# EAGLE board BE_SHIELD (EAGLE 6.4)
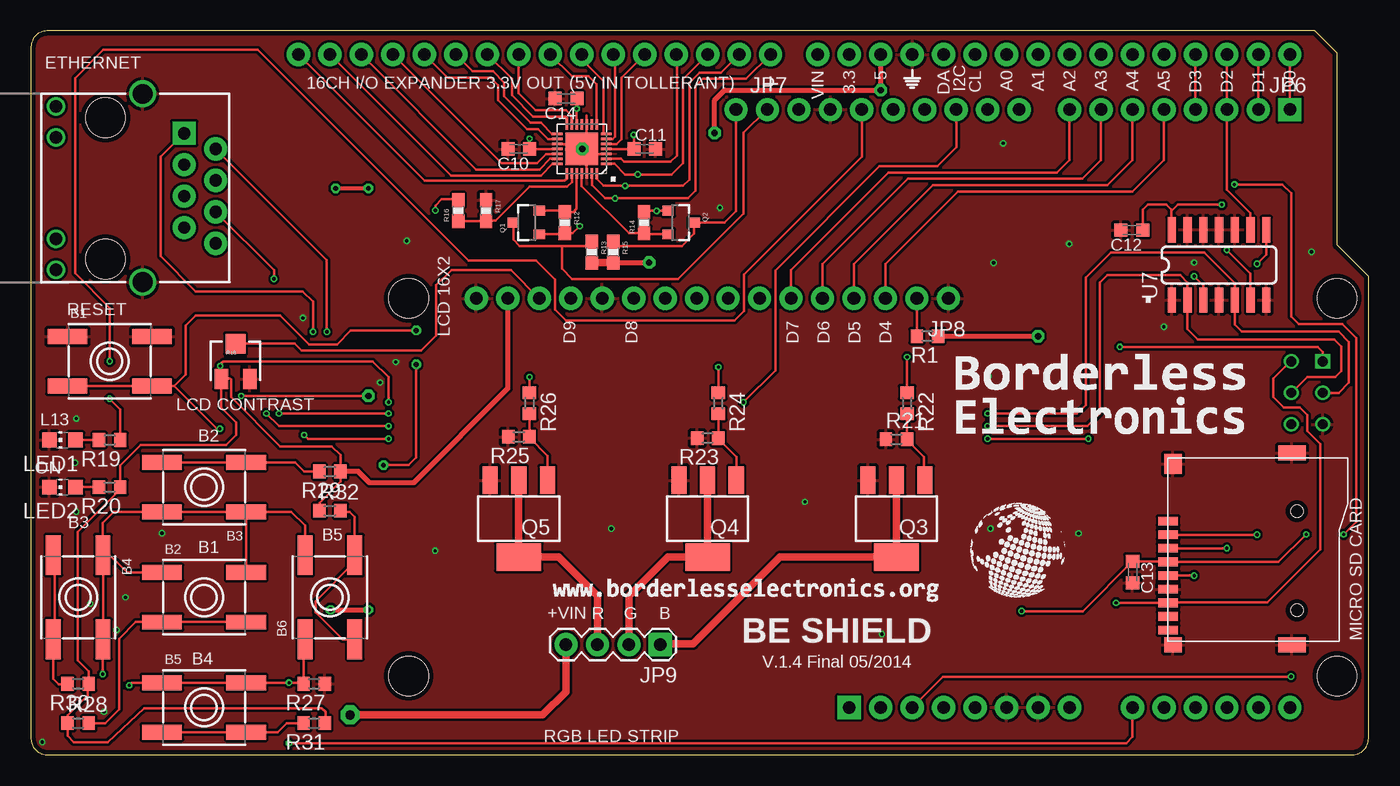
[diagram p0: board, top side]
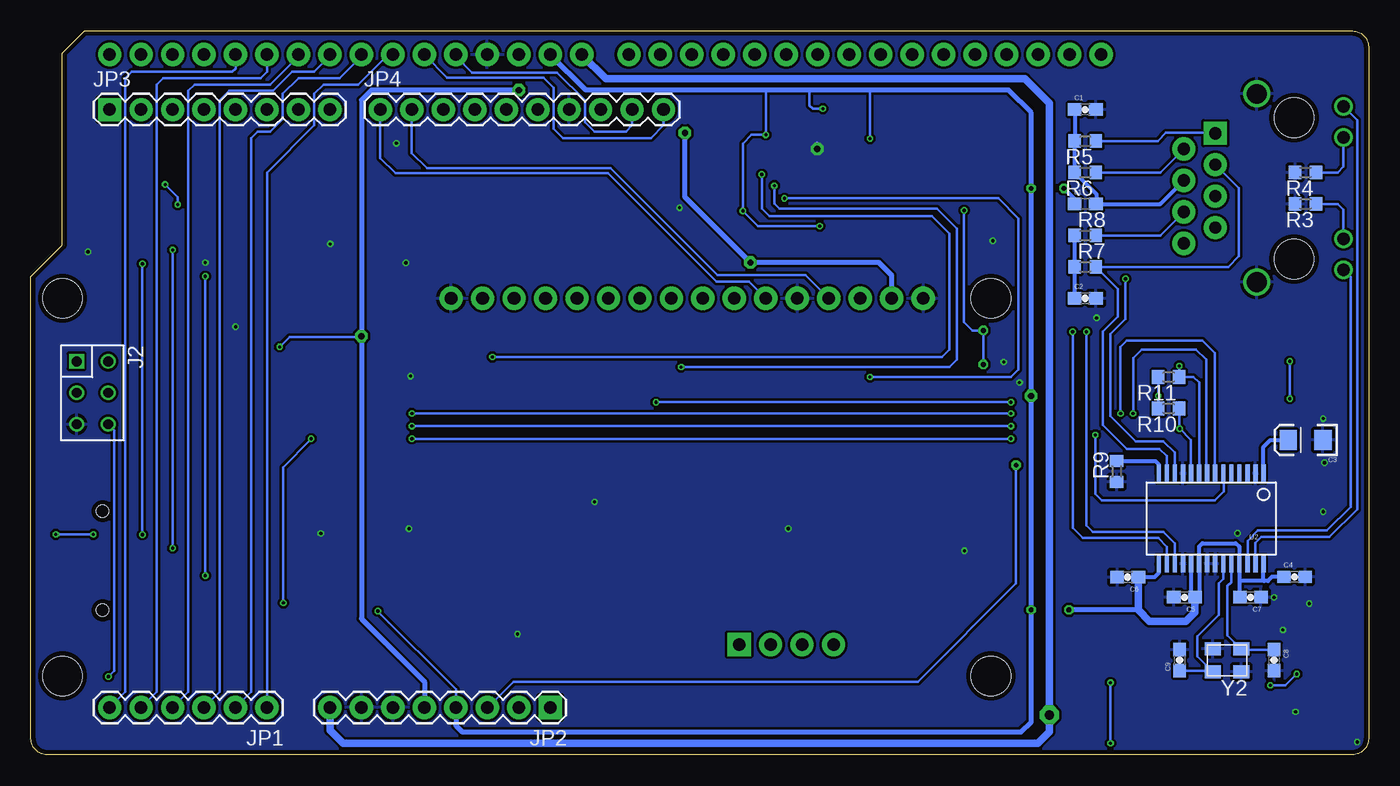
[diagram p1: board, bottom side, seen from below]

Size 107.95 x 58.42 mm. Coordinates in mm from the lower left corner, seen from the top.
Outline: 1.27,0 106.68,0 arc90 107.95,1.27 107.95,38.61 105.41,41.15 105.41,56.64 103.63,58.42 1.27,58.42 arc90 0,57.15 0,1.27 arc90 1.27,0
Copper layers (1*16): Top 0.035mm / dielectric 1.53mm / Bottom 0.035mm
Design rules "default *": minimum track width 8mil, minimum drill 10mil, track to track 8mil, track to pad 8mil, pad to pad 8mil, via to via 8mil, smd to smd 8mil, copper to edge 15mil, drill to drill 28mil, minimum pad ring 5mil, minimum via ring 5mil, stop-mask expansion 4mil, vias tented up to drill 100mil, thermal gap 10mil
Net classes: 1 power: width 0.254 mm, drill 0.254 mm, clearance 0.254 mm
Holes 3.17 mm at 30.48,36.83 105.41,36.83 105.41,6.35 30.48,6.35

## Footprints (pad centres in the part's own frame; a part is rotated, then mirrored left to right if it is on the bottom)
EVQ-Q2 = smd 3.2 x 1.2: A -3.4,-2; A' 3.4,-2; B -3.4,2; B' 3.4,2
0603-CAP = smd 1.1 x 1: 1 -0.85,0; 2 0.85,0
EIA3216 = smd 1.4 x 1.6: A 1.4,0; C -1.4,0
C0603K = smd 1.05 x 1.08: 1 -0.875,0; 2 0.875,0
MAGJACK = drill 1 pad 1.88 square: 1 3.175,17.445 | drill 1 pad 1.88: 2 4.445,19.985; 3 5.715,17.445; 4 6.985,19.985; 5 8.255,17.445; 6 9.525,19.985; 7 10.795,17.445; 8 12.065,19.985 | drill 1 pad 1.27: 9 1,7.1; 10 3.5,7.1; 11 11.7,7.1; 12 14.2,7.1 | drill 1.6 pad 2.184: M1 0,14.1; M2 15.2,14.1 | hole 3.2: 1.905,11.095; 13.335,11.095
M2X3 = drill 0.8 square: 1 -2.54,-1.27 | drill 0.8: 2 -2.54,1.27; 3 0,-1.27; 4 0,1.27; 5 2.54,-1.27; 6 2.54,1.27
1X06 = drill 1.016 pad 1.88: 1 0,0; 2 2.54,0; 3 5.08,0; 4 7.62,0; 5 10.16,0; 6 12.7,0
1X08 = drill 1.016 pad 1.88 square: 1 0,0 | drill 1.016 pad 1.88: 2 2.54,0; 3 5.08,0; 4 7.62,0; 5 10.16,0; 6 12.7,0; 7 15.24,0; 8 17.78,0
1X10 = drill 1.016 pad 1.88: 1 0,0; 2 2.54,0; 3 5.08,0; 4 7.62,0; 5 10.16,0; 6 12.7,0; 7 15.24,0; 8 17.78,0; 9 20.32,0; 10 22.86,0
1X16_NO_SILK = drill 1.016 pad 1.88: 1 0,0; 2 2.54,0; 3 5.08,0; 4 7.62,0; 5 10.16,0; 6 12.7,0; 7 15.24,0; 8 17.78,0; 9 20.32,0; 10 22.86,0; 11 25.4,0; 12 27.94,0; 13 30.48,0; 14 33.02,0; 15 35.56,0; 16 38.1,0
1X04 = drill 1.016 pad 1.88 square: 1 0,0 | drill 1.016 pad 1.88: 2 2.54,0; 3 5.08,0; 4 7.62,0
0603 = smd 1.1 x 1: 1 -0.85,0; 2 0.85,0
CHIP-LED0805 = smd 1.2 x 1.2: A 0,-1.05; C 0,1.05
SOT23-3 = smd 0.8 x 0.9: 1 -0.95,-1; 2 0.95,-1; 3 0,1.1
SOT223 = smd 1.219 x 2.235: 1 -2.311,-3.099; 2 0,-3.099; 3 2.311,-3.099 | smd 3.6 x 2.2: 4 0,3.099
R0603 = smd 1 x 1.1: 1 -0.85,0; 2 0.85,0
0603-RES = smd 1.1 x 1: 1 -0.85,0; 2 0.85,0
TRIMPOT-3MM-2 = smd 1.092 x 1.6: 1 -1.155,-1.421; 3 1.155,-1.421 | smd 1.6 x 1.6: 2 0,1.421
QFN-28 = smd 0.85 x 0.2: 1 -1.975,1.2; 2 -1.975,0.8; 3 -1.975,0.4; 4 -1.975,0; 5 -1.975,-0.4; 6 -1.975,-0.8; 7 -1.975,-1.2; 15 1.975,-1.2; 16 1.975,-0.8; 17 1.975,-0.4; 18 1.975,0; 19 1.975,0.4; 20 1.975,0.8; 21 1.975,1.2 | smd 0.2 x 0.85: 8 -1.2,-1.975; 9 -0.8,-1.975; 10 -0.4,-1.975; 11 0,-1.975; 12 0.4,-1.975; 13 0.8,-1.975; 14 1.2,-1.975; 22 1.2,1.975; 23 0.8,1.975; 24 0.4,1.975; 25 0,1.975; 26 -0.4,1.975; 27 -0.8,1.975; 28 -1.2,1.975 | smd 2.65 x 2.65: 29 0,0
SSOP28DB = smd 0.348 x 1.397: 1 -4.225,-3.656; 2 -3.575,-3.656; 3 -2.925,-3.656; 4 -2.275,-3.656; 5 -1.625,-3.656; 6 -0.975,-3.656; 7 -0.325,-3.656; 8 0.325,-3.656; 9 0.975,-3.656; 10 1.625,-3.656; 11 2.275,-3.656; 12 2.925,-3.656; 13 3.575,-3.656; 14 4.225,-3.656; 15 4.225,3.656; 16 3.575,3.656; 17 2.925,3.656; 18 2.275,3.656; 19 1.625,3.656; 20 0.975,3.656; 21 0.325,3.656; 22 -0.325,3.656; 23 -0.975,3.656; 24 -1.625,3.656; 25 -2.275,3.656; 26 -2.925,3.656; 27 -3.575,3.656; 28 -4.225,3.656
SO014 = smd 0.66 x 2.032: 1 -3.175,-2.68; 2 -1.905,-2.68; 3 -0.635,-2.68; 4 0.635,-2.68; 5 1.905,-2.68; 6 3.175,-2.68; 7 4.445,-2.68; 8 4.445,2.997; 9 3.175,2.997; 10 1.905,2.997; 11 0.635,2.997; 12 -0.635,2.997; 13 -1.905,2.997; 14 -3.175,2.997
TFWF6-EBS1-1102 = smd 0.7 x 1.6: P$1 10.6,11.1; P$2 9.5,11.1; P$3 8.4,11.1; P$4 7.3,11.1; P$5 6.2,11.1; P$6 5.1,11.1; P$7 4,11.1; P$8 2.9,11.1; P$9 1.8,11.1 | smd 1.2 x 2.2: S$1 0.6,1.1; S$4 16.1,1.1 | smd 1.2 x 1.4: S$2 0.6,10.7 | smd 1.6 x 1.4: S$3 15.2,10.7 | hole 1: 3.4,0.7; 11.4,0.7
CRYSTAL-3.2-2.5 = smd 1.3 x 1.05: 1 -1.15,-0.925; 2 1.15,-0.925; 3 1.15,0.925; 4 -1.15,0.925

## Placement (x,y rotation side)
B1  [EVQ-Q2]  6.35,31.75 0 top
B2  [EVQ-Q2]  13.97,12.7 0 top
B3  [EVQ-Q2]  13.97,21.59 180 top
B4  [EVQ-Q2]  3.81,12.7 270 top
B5  [EVQ-Q2]  13.97,3.81 0 top
B6  [EVQ-Q2]  24.13,12.7 90 top
C1  100nf  [0603-CAP]  22.86,52.07 0 bottom
C2  10nf  [0603-CAP]  22.86,36.83 0 bottom
C3  10uF  [EIA3216]  5.08,25.4 180 bottom
C4  100nf  [0603-CAP]  5.97,14.35 0 bottom
C5  100nf  [0603-CAP]  14.86,12.7 180 bottom
C6  100nf  [0603-CAP]  19.43,14.33 180 bottom
C7  100nf  [0603-CAP]  9.53,12.7 180 bottom
C8  10p  [0603-CAP]  7.62,7.62 270 bottom
C9  10p  [0603-CAP]  15.24,7.62 90 bottom
C10  100nF  [C0603K]  39.37,48.9 180 top
C11  100nF  [C0603K]  49.53,48.9 0 top
C12  100nF  [C0603K]  88.85,42.34 180 top
C13  100nF  [C0603K]  88.9,14.73 270 top
C14  100nF  [C0603K]  43.18,52.96 180 top
J1  MAGJACK  [MAGJACK]  -5.08,53.34 270 top
J2  CON_HEADER_2X03-PTH  [M2X3]  103,29.21 270 bottom
JP1  [1X06]  88.9,3.81 180 bottom
JP2  [1X08]  66.04,3.81 180 bottom
JP3  [1X08]  101.6,52.07 0 bottom
JP4  M10"  [1X10]  79.76,52.07 0 bottom
JP6  M161X16_NO_SILK  [1X16_NO_SILK]  101.6,56.52 180 top
JP7  M161X16_NO_SILK  [1X16_NO_SILK]  59.69,56.52 180 top
JP8  M161X16_NO_SILK  [1X16_NO_SILK]  74.04,36.83 180 top
JP9  [1X04]  50.8,8.89 180 top
L1  MMZ1608B601C  [0603]  22.86,44.45 0 bottom
LED1  YELLOW  [CHIP-LED0805]  2.54,25.4 90 top
LED2  GREEN  [CHIP-LED0805]  2.54,21.59 90 top
Q1  BSS138  [SOT23-3]  40.03,42.95 90 top
Q2  BSS138  [SOT23-3]  52.43,42.95 270 top
Q3  N-HEXFET-2D_SOT232-IRLL014N  [SOT223]  69.85,19.05 180 top
Q4  N-HEXFET-2D_SOT232-IRLL014N  [SOT223]  54.61,19.05 180 top
Q5  N-HEXFET-2D_SOT232-IRLL014N  [SOT223]  39.37,19.05 180 top
R1  270  [R0603]  72.35,33.78 180 top
R3  220  [R0603]  5.08,44.45 180 bottom
R4  220  [R0603]  5.08,46.99 180 bottom
R5  49.9 1%  [R0603]  22.86,49.53 180 bottom
R6  49.9 1%  [R0603]  22.86,46.99 180 bottom
R7  49.9 1%  [R0603]  22.86,39.37 0 bottom
R8  49.9 1%  [R0603]  22.86,41.91 0 bottom
R9  2K 1%  [R0603]  20.32,22.86 90 bottom
R10  10k  [R0603]  16.13,27.94 180 bottom
R11  100k  [R0603]  16.13,30.48 180 bottom
R12  10k  [0603-RES]  43.08,42.95 270 top
R13  10k  [0603-RES]  45.26,40.56 270 top
R14  10k  [0603-RES]  49.48,42.95 90 top
R15  10k  [0603-RES]  46.99,40.56 270 top
R16  10k  [0603-RES]  34.49,43.92 90 top
R17  22k  [0603-RES]  36.73,43.92 270 top
R18  TRIMPOT3MM-2  [TRIMPOT-3MM-2]  16.51,31.75 0 top
R19  470  [R0603]  6.35,25.4 180 top
R20  470  [R0603]  6.35,21.59 180 top
R21  100k  [R0603]  69.85,25.45 0 top
R22  100  [R0603]  70.71,28.37 270 top
R23  100k  [R0603]  54.61,25.55 180 top
R24  100  [R0603]  55.47,28.37 270 top
R25  100k  [R0603]  39.37,25.65 180 top
R26  100  [R0603]  40.23,28.37 270 top
R27  1k  [R0603]  22.86,5.71 180 top
R28  2k2  [R0603]  3.81,2.54 0 top
R29  4k7  [R0603]  24.13,22.86 180 top
R30  8k2  [R0603]  3.81,5.71 180 top
R31  12k  [R0603]  22.86,2.54 180 top
R32  15k  [R0603]  24.13,19.68 0 top
U1  SX1509  [QFN-28]  44.45,48.9 180 top
U2  ENC28j60  [SSOP28DB]  12.7,19.05 180 bottom
U7  74AHC125  [SO014]  95.25,39.37 0 top
U$3  TFWF6-EBS1-1102  [TFWF6-EBS1-1102]  102.87,8.26 90 top
Y2  25MHz  [CRYSTAL-3.2-2.5]  11.43,7.62 180 bottom

## Library data of the parts
B1-B6 = microbuilder
C1 C2 C4-C9 = SparkFun-Capacitors
C3 = SparkFun-Capacitors; PROD_ID: CAP-00811
C10-C14 R3-R11 = rcl
J1 JP1-JP4 JP6-JP9 = SparkFun-Connectors
J2 = dp_devices
L1 R12-R17 = SparkFun-Passives
LED1 LED2 = led
Q1 Q2 = SparkFun-DiscreteSemi
Q3-Q5 = transistor-power
R1 R19-R32 = resistor
R18 = SparkFun-Electromechanical
U1 U2 = SparkFun-DigitalIC
U7 = CH_logic
U$3 = smARtDUINO
Y2 = SmartPrj

## Nets
+3V3: C4.1 C5.1 C6.1 C7.2 C10.1 C11.1 C12.1 C13.1 C14.1 JP2.4 JP6.15 L1.1 Q1.1 Q2.1 R10.2 R11.2 R12.2 R14.2 U1.4 U1.12 U1.18 U2.15 U2.19 U2.20 U2.25 U2.28 U7.14 U$3.P$4
+5V [power]: J2.1 JP2.5 JP6.14 JP8.15 R1.1 R13.2 R15.2 R18.1 R20.1 R28.1 R29.1 R30.1 R31.1 R32.1
+VIN: JP2.8 JP6.16 JP9.4
A0: B2.B B2.B' B3.B B3.B' B4.B B4.B' B5.B B5.B' B6.B B6.B' JP1.1 JP6.10 R27.2
A1: JP1.2 JP6.9
A2: JP1.3 JP6.8
A3: JP1.4 JP6.7
A4: JP1.5 JP6.6
A5: JP1.6 JP6.5
AREF: JP4.8
CONTR: JP8.14 R18.2
CS_3V3: U7.8 U$3.P$2
D0: JP3.1 JP6.1
D1: JP3.2 JP6.2
D2: JP3.3 JP6.3 U7.9
D3: JP3.4 JP6.4
D4: JP3.5 JP8.3
D5: JP3.6 JP8.4
D6: JP3.7 JP8.5
D7: JP3.8 JP8.6
D8: JP4.1 JP8.11
D9: JP4.2 JP8.13
D10: JP4.3 R11.1 U2.9
D11: JP4.4
D12: JP4.5
D13: JP4.6 R19.1
D100: JP7.1 R26.1 U1.27
D101: JP7.2 R24.1 U1.28
D102: JP7.3 R22.1 U1.1
D103: JP7.4 U1.2
D104: JP7.5 U1.5
D105: JP7.6 U1.6
D106: JP7.7 U1.7
D107: JP7.8 U1.8
D108: JP7.9 U1.13
D109: JP7.10 U1.14
D110: JP7.11 U1.15
D111: JP7.12 U1.16
D112: JP7.13 U1.19
D113: JP7.14 U1.20
D114: JP7.15 U1.21
D115: JP7.16 U1.22
GND: B1.B B1.B' C1.2 C2.2 C3.C C4.2 C5.2 C6.2 C7.1 C8.2 C9.2 C10.2 C11.2 C12.2 C13.2 C14.2 J1.M1 J1.M2 J2.5 JP2.6 JP2.7 JP4.7 JP6.13 JP8.1 JP8.12 JP8.16 LED1.C LED2.C Q3.3 Q4.3 Q5.3 R3.2 R4.2 R9.1 R17.1 R18.3 R21.1 R23.2 R25.2 R27.1 U1.3 U1.10 U1.17 U1.26 U1.29 U2.2 U2.11 U2.18 U2.21 U2.22 U7.1 U7.4 U7.7 U7.10 U7.11 U7.12 U7.13 U$3.P$6 U$3.S$1 U$3.S$2 U$3.S$3 U$3.S$4 Y2.2 Y2.4
IOREF: JP2.2
LCD_LED: JP8.2 R1.2
LEDA: J1.9 U2.27
LEDB: J1.12 U2.26
MISO: J2.2 U2.6 U$3.P$7
MOSI: J2.3 U2.7 U7.5
MOSI_3V3: U7.6 U$3.P$3
N$1: C2.1 R7.1 R8.1
N$2: J1.11 R3.1
N$3: R9.2 U2.14
N$4: J1.10 R4.1
N$5: C3.A U2.1
N$8: Q5.1 R25.1 R26.2
N$9: LED2.A R20.2
N$10: LED1.A R19.2
N$11: C1.1 J1.4 L1.2 R5.2 R6.2
N$13: Q3.1 R21.2 R22.2
N$14: Q4.1 R23.1 R24.2
N$15: B2.A B2.A' R28.2
N$16: B3.A B3.A' R29.2
N$17: B4.A B4.A' R30.2
N$18: B5.A B5.A' R31.2
N$19: B6.A B6.A' R32.2
OSC1: C9.1 U2.23 Y2.3
OSC2: C8.1 U2.24 Y2.1
RESET: B1.A B1.A' J2.6 JP2.3 R10.1 R16.2 U2.10
RESET_EXP: R16.1 R17.2 U1.23
SCK: J2.4 U2.8 U7.2
SCK_3V3: U7.3 U$3.P$5
SCL: JP4.10 JP6.11 Q2.3 R15.1
SCL_3V3: Q2.2 R14.1 U1.25
SDA: JP4.9 JP6.12 Q1.3 R13.1
SDA_3V3: Q1.2 R12.1 U1.24
STRIP_B: JP9.3 Q5.2 Q5.4
STRIP_G: JP9.1 Q3.2 Q3.4
STRIP_R: JP9.2 Q4.2 Q4.4
TPIN+: J1.3 R7.2 U2.13
TPIN-: J1.6 R8.2 U2.12
TPOUT+: J1.1 R5.1 U2.17
TPOUT-: J1.2 R6.1 U2.16

## Tracks (layer width: path | path; a pad name or v marks a point on that pad's centre or on a via)
+3V3  (via drill 0.25 pad 0.51, 0.38 pad 0.76, 0.51 pad 1.02)
  Top 0.203: U1.12 | Q2.1 50.48,43.9 | R14.2 49.58,43.9 50.48,43.9 | Q1.1 42.98,42 R12.2 43.73,42.1 v44.3,42.67 | C14.1 44.05,52.16 v44.04,52.15 v44.05,52.14 U1.12 | v48.64,50.04 48.66,50.02 C11.1 U1.4 | v40.23,49.73 40.24,49.72 C10.1 U1.18 | 50.48,43.9 v50.49,43.89 | U7.14 92.05,42.39 92.05,43.89 | C12.1 89.72,44 90.12,44.4 91.64,44.4 92.05,43.99 92.05,43.89 | v79.96,11.58 84.88,11.58 C13.1 91.72,15.61 U$3.P$4 100.69,15.54 v102.92,17.78 | 92.05,43.89 92.56,44.4 v96.11,44.4 | v97.13,46.02 100.99,46.02 101.7,45.31 101.7,35.36 102.31,34.75 105.84,34.75 106.96,33.63 106.96,18.8 v105.94,17.78 | v16.97,28.96 v27.23,28.96
  Top 0.305: v24.59,45.72 v27.23,45.72
  Top 0.406: v24.18,11.68 v27.23,11.68
  Bottom 0.203: v44.04,52.15 44.86,52.15 45.11,52.4 45.11,53.62 45.09,53.65 | 48.62,53.65 48.64,53.62 v48.64,50.04 49.78,50.04 50.49,49.33 v50.49,43.89 49.28,42.67 v44.3,42.67 | v40.23,49.73 40.23,53.65 | JP2.4 73.66,5.28 v79.96,11.58 | v96.11,44.4 96.11,45.01 v97.13,46.02 | v105.94,17.78 v102.92,17.78 | R11.2 16.98,29.17 v16.97,28.96 16.97,28.04
  Bottom 0.305: 14.32,13.02 C5.1 | U2.15 16.93,14.67 17.27,14.33 C6.1 | 10.43,14.02 U2.25 10.44,15.41 10.44,16.79 10.72,17.07 13.41,17.07 13.68,16.8 U2.20 13.68,13.03 C5.1 | 10.43,14.02 10.43,12.75 C7.2 | U2.19 14.32,15.44 14.33,15.44 14.33,13.02 C5.1 | L1.1 23.71,44.84 v24.59,45.72 | U2.28 8.48,15.38 8.48,14.07 8.43,14.02 | C4.1 7.8,14.35 8.13,14.02 8.43,14.02 | 8.43,14.02 10.43,14.02
  Bottom 0.406: R10.2 16.98,28.03 16.97,28.04 | JP2.4 73.66,2.34 73.15,1.83 28.04,1.83 27.23,2.64 v27.23,11.68 v27.23,28.96 v27.23,45.72 27.23,51.82 29.06,53.65 40.23,53.65 45.09,53.65 48.62,53.65 63.17,53.65 JP6.15 | 18.58,11.67 v24.17,11.67 v24.18,11.68
  Bottom 0.61: C6.1 18.58,11.67 17.68,10.77 14.73,10.77 14.02,11.48 14.02,12.69 C5.1
+5V  (via drill 0.25 pad 0.51, 0.51 pad 1.02)
  Top 0.203: R31.1 23.77,2.6 23.77,3.45 23.47,3.76 9.14,3.76 6.2,1.02 3.45,1.02 2.96,1.51 R28.1 2.96,3.16 4.57,4.78 4.57,5.63 R30.1 4.67,5.73 4.67,6.71 3.76,7.62 3.76,17.98 7.2,21.42 R20.1 7.2,23.35 8.84,24.99 15.75,24.99 16.56,25.81 16.56,26.82 15.34,28.04 15.34,30.32 R18.1 15.4,30.38 16.05,30.38 16.15,30.28 16.15,28.85 20.12,24.89 24.28,24.89 24.98,24.19 R29.1 24.99,22.85 24.99,22.05 23.28,20.33 R32.1 | J2.1 104.27,32.49 103.83,32.92 v87.88,32.92
  Top 0.406: R15.2 49.87,39.71 v49.89,39.73 | v55.17,50.19 55.17,52.83 55.98,53.65 v68.58,53.65 JP6.14 | R1.1 v81.28,33.78 | JP8.15 38.48,29.54 30.89,21.95 27.33,21.95 26.42,22.86 R29.1
  Top 0.61: R15.2 R13.2
  Bottom 0.203: v87.88,32.92 87.07,33.73 81.33,33.73 v81.28,33.78
  Bottom 0.406: v68.58,53.65 80.47,53.65 81.28,52.83 v81.28,33.78 81.28,10.97 76.2,5.89 JP2.5 | v55.17,50.19 55.17,45.01 v49.89,39.73 39.52,39.73 38.48,38.68 JP8.15
+VIN  (via drill 0.76 pad 1.52)
  Top 0.61: JP9.4 43.18,5.08 41.3,3.2 v25.76,3.2
  Bottom 0.61: JP2.8 83.82,1.98 82.75,0.91 26.67,0.91 25.76,1.83 v25.76,3.2 25.76,52.58 27.74,54.56 61.54,54.56 JP6.16
A0  (via drill 0.25 pad 0.51)
  Top 0.203: B6.B 22.01,9.18 R27.2 21.91,5.81 v20.83,5.81 20.32,5.81 B5.B' B5.B 8.15,5.81 v7.92,5.59 | B6.B' 22.12,16.09 22.12,18.49 21.01,19.59 B3.B | 5.79,16.66 5.79,18.69 6.69,19.59 B3.B' B3.B | 5.79,16.66 5.79,16.12 B4.B B4.B' 5.79,9.28 v5.79,6.5 | B2.B 7.75,14.7 5.79,16.66 | B2.B' B3.B | JP1.1 88.9,1.42 88.39,0.91 v20.83,0.91
  Bottom 0.203: v7.92,5.59 6.71,5.59 v5.79,6.5 | JP6.10 79.12,56.52 81.53,54.1 84.33,54.1 85.09,53.34 85.09,50.8 88.9,46.99 JP1.1 | v20.83,0.91 v20.83,5.81
A1
  Bottom 0.203: JP6.9 81.28,56.39 83.06,54.61 86.36,54.61 87.63,53.34 87.63,51.31 88.65,50.29 89.66,50.29 90.17,49.78 90.17,5.08 JP1.2
A2
  Bottom 0.203: JP6.8 83.82,56.39 85.09,55.12 86.87,55.12 88.39,53.59 91.95,53.59 92.71,52.83 92.71,5.08 JP1.3
A3
  Bottom 0.203: JP6.7 86.36,56.39 88.65,54.1 94.74,54.1 95.25,53.59 95.25,5.08 JP1.4
A4
  Bottom 0.203: JP6.6 88.9,55.12 89.41,54.61 97.28,54.61 97.79,54.1 97.79,5.08 JP1.5
A5
  Bottom 0.203: JP6.5 91.44,55.37 91.69,55.12 99.82,55.12 100.33,54.61 100.33,5.08 JP1.6
CONTR
  Top 0.203: R18.2 21.29,33.17 21.84,32.61 31.5,32.61 32.72,33.83 32.72,37.9 33.93,39.12 38.73,39.12 JP8.14
CS_3V3  (via drill 0.25 pad 0.51)
  Top 0.203: U7.8 99.69,40.36 v98.96,39.62 | v98.96,17.75 U$3.P$2 | U$3.P$2
  Bottom 0.203: v98.96,39.62 v98.96,17.75
D0
  Top 0.203: JP6.1 JP3.1
D1
  Top 0.203: JP6.2 JP3.2
D2
  Top 0.203: JP6.3 JP3.3 96.52,45.62 98.42,43.71 U7.9
D3
  Top 0.203: JP6.4 JP3.4
D4
  Top 0.203: JP8.3 68.96,39.6 74.83,45.47 88.9,45.47 91.44,48.01 JP3.5
D5
  Top 0.203: JP8.4 66.42,39.6 72.8,45.97 86.87,45.97 88.9,48.01 JP3.6
D6
  Top 0.203: JP3.7 86.36,51.05 86.36,50.8 86.36,48.01 84.84,46.48 70.76,46.48 63.88,39.6 JP8.5
D7
  Top 0.203: JP3.8 83.82,48.01 82.8,46.99 69.22,46.99 61.34,39.12 JP8.6
D8
  Bottom 0.203: JP4.1 79.76,48.16 78.54,46.94 61.37,46.94 52.63,38.2 50.01,38.2 JP8.11
D9
  Bottom 0.203: JP4.2 77.22,48.56 76,47.35 61.16,47.35 52.53,38.71 45.44,38.71 JP8.13
D10  (via drill 0.25 pad 0.51)
  Top 0.203: v15.27,31.37 15.27,31.52 15.49,31.75 27.58,31.75 28.85,30.48 v28.85,28.45 | JP4.3 74.68,49.02 73.15,47.5 68.48,47.5 60.07,39.09 60.07,31.01 v57.51,28.45
  Bottom 0.203: U2.9 13.68,30.03 14.12,30.48 R11.1 15.28,31.36 v15.27,31.37 | v28.85,28.45 56.49,28.45 v57.51,28.45
D13  (via drill 0.25 pad 0.51)
  Top 0.203: R19.1 7.2,27.88 v6.35,28.73 | v6.35,31.75 6.35,36.07 3.56,38.86 3.56,54.61 5.84,56.9 18.29,56.9 35.31,39.88 40.77,39.88 42.29,38.35 42.29,35.94 43.18,35.05 56.77,35.05 57.53,35.81 57.53,38.73 67.06,48.26 JP4.6
  Bottom 0.203: v6.35,28.73 v6.35,31.75
D100  (via drill 0.25 pad 0.51)
  Top 0.203: JP7.1 59.66,56.52 57.71,54.56 54.25,54.56 53.65,53.95 53.65,45.52 53.03,44.91 47.75,44.91 v47.14,44.91 46.33,44.91 45.26,45.97 45.26,46.91 U1.27 | R26.1 v40.23,30.48
  Bottom 0.203: v40.23,30.48 28.85,30.48 28.25,31.09 28.25,43.28 29.87,44.91 v47.14,44.91
D101  (via drill 0.25 pad 0.51)
  Top 0.203: JP7.2 57.12,56.52 55.68,55.07 53.95,55.07 53.14,54.25 53.14,46.43 52.63,45.92 v47.95,45.92 46.23,45.92 45.65,46.5 U1.28 | R24.1 v55.47,31.29
  Bottom 0.203: v55.47,31.29 33.83,31.29 33.22,31.9 33.22,42.47 34.85,44.09 47.55,44.09 47.95,44.5 v47.95,45.92
D102  (via drill 0.25 pad 0.51)
  Top 0.203: JP7.3 52.63,54.53 52.63,47.75 51.71,46.84 v48.97,46.84 47.95,46.84 47.1,47.7 U1.1 | R22.1 v70.71,32.11
  Bottom 0.203: v70.71,32.11 34.44,32.11 33.83,32.72 33.83,42.06 35.26,43.48 48.36,43.48 48.97,44.09 v48.97,46.84
D103
  Top 0.203: U1.2 47.61,48.09 47.85,47.85 51.61,47.85 52.12,48.36 52.12,56.46 JP7.4
D104
  Top 0.203: U1.5 47.26,49.3 47.65,49.68 47.65,54.63 JP7.5
D105
  Top 0.203: U1.6 46.95,49.7 47.14,49.89 47.14,56.36 JP7.6
D106
  Top 0.203: JP7.7 44.45,56.13 46.23,54.36 46.23,50.29 U1.7
D107
  Top 0.203: U1.8 45.65,54.12 45.01,54.76 43.66,54.76 JP7.8
D108
  Top 0.203: JP7.9 39.37,53.39 40.74,52.02 43.18,52.02 43.64,51.56 43.64,50.88 U1.13
D109
  Top 0.203: JP7.10 36.85,56.52 38.81,54.56 38.81,53.24 40.54,51.51 43.16,51.51 43.26,51.41 U1.14
D110
  Top 0.203: U1.15 42.06,50.09 41.15,51 40.34,51 38.2,53.14 38.2,54.25 37.29,55.17 35.64,55.17 JP7.11
D111
  Top 0.203: U1.16 41.74,49.7 40.95,50.49 40.03,50.49 37.69,52.83 37.69,54.05 37.08,54.66 33.6,54.66 JP7.12
D112
  Top 0.203: U1.19 41.59,48.49 40.84,47.75 37.97,47.75 JP7.13
D113
  Top 0.203: U1.20 41.9,48.09 41.05,47.24 35.94,47.24 JP7.14
D114
  Top 0.203: U1.21 42.11,47.7 41.15,46.74 33.91,46.74 JP7.15
D115
  Top 0.203: U1.22 43.25,46.5 43.08,46.33 31.77,46.33 JP7.16
GND  (via drill 0.25 pad 0.51, 0.51 pad 1.02)
  Top 0.203: U1.17 44.05,49.3 U1.29 | U1.10 44.85,49.3 U1.29 | U1.26 44.85,48.49 | 44.85,48.49 U1.29 | 44.85,48.49 44.85,48.55 | 44.85,48.55 v44.5,48.9 | U1.3 44.9,48.49 44.85,48.55
  Bottom 0.203: v44.5,48.9 44.5,49.4
  other vias: 3.66,19.61 0.91,1.02 10.57,17.88 7.62,12.7 3.66,27.13 3.56,23.57 4.78,12.19 6.91,10.06 5.89,3.45 91.44,34.54 93.88,39.73 28.17,30.05 21.95,35.26 30.33,41.48 32.61,16.46 46.84,18.24 62.46,20.4 68.68,9.73 77.44,18.24 77.32,30.56 77.7,39.7 84.56,17.86 83.79,41.22 78.46,49.35 55.6,44.15 29.44,31.7 103.35,40.59
  pour Top: 1.27,0 arc-90 0,1.27 0,57.15 arc-90 1.27,58.42 103.5,58.42 105.41,56.64 105.41,41.27 107.95,38.73 107.95,1.27 arc-90 106.68,0
  pour Bottom: 0,57.15 arc-90 1.27,58.42 103.5,58.42 105.41,56.64 105.41,41.27 107.95,38.73 107.95,1.27 arc-90 106.68,0 1.27,0 arc-90 0,1.27
LCD_LED
  Top 0.203: R1.2 JP8.2
LEDA
  Bottom 0.203: U2.27 9.12,17.09 8.64,17.58 3.15,17.58 0.91,19.81 0.91,51.21 2.02,52.31 J1.9
LEDB
  Bottom 0.203: U2.26 9.78,15.62 9.75,15.65 9.75,17.27 8.94,18.09 3.35,18.09 1.42,20.02 1.42,38.54 J1.12
MISO  (via drill 0.25 pad 0.51)
  Top 0.203: J2.2 101.65,31.75 100.28,30.38 100.28,28.85 101.09,28.04 102.41,28.04 103.02,27.43 103.02,26.11 104.04,25.09 104.04,16.56 99.77,12.29 91.81,12.29 U$3.P$7 87.59,12.26 v87.58,12.24 | v85.34,25.5 v77.22,25.5 | v28.85,25.5 22.35,25.5 v22.05,25.81
  Bottom 0.203: v87.58,12.24 87.58,23.16 v85.34,25.5 | v77.22,25.5 v28.85,25.5 | v22.05,25.81 22.05,21.03 21.54,20.52 12.39,20.52 11.68,21.23 11.68,22.66 U2.6
MOSI  (via drill 0.25 pad 0.51)
  Top 0.203: J2.3 105.56,29.21 106.38,30.02 106.38,33.3 105.54,34.14 97.74,34.14 97.16,34.72 U7.5 97.16,38.08 94.69,40.54 87.17,40.54 85.14,38.51 85.14,28.25 84.43,27.53 v77.22,27.53 | v28.85,27.53 v20.02,27.53
  Bottom 0.203: v77.22,27.53 v28.85,27.53 | v20.02,27.53 20.02,32.92 19.51,33.43 13.41,33.43 12.39,32.41 12.39,22.73 U2.7
MOSI_3V3  (via drill 0.25 pad 0.51)
  Top 0.203: U7.6 98.42,38.84 v96.52,40.74 | v96.52,16.66 U$3.P$3
  Bottom 0.203: v96.52,40.74 v96.52,16.66
N$1
  Bottom 0.305: C2.1 R7.1 R8.1
N$2
  Bottom 0.203: R3.1 2.49,44.45 2.03,43.99 2.03,41.65 J1.11
N$3
  Bottom 0.305: U2.14 16.93,23.43 17.17,23.67 20.28,23.67 R9.2
N$4
  Bottom 0.203: R4.1 2.49,46.99 2.03,47.45 2.03,49.83 J1.10
N$5
  Bottom 0.305: U2.1 8.47,24.85 7.92,25.4 C3.A
N$8
  Top 0.203: Q5.1 41.71,22.18 41.71,24.13 40.22,25.62 R25.1 40.23,25.67 R26.2
N$9
  Top 0.203: LED2.A R20.2
N$10
  Top 0.203: LED1.A R19.2
N$11
  Bottom 0.305: J1.4 16.81,44.45 L1.2 22,44.45 21.95,44.4 21.95,45.23 R6.2 R5.2 C1.1
N$12
  Top 0.203: 44.85,51.56 44.85,50.8
N$13
  Top 0.203: Q3.1 72.49,21.82 72.49,21.69 72.08,22.1 72.08,24.03 70.7,25.41 R21.2 70.71,25.46 R22.2
N$14
  Top 0.203: Q4.1 56.95,22.18 56.95,24.03 55.46,25.52 R23.1 55.47,25.57 R24.2
N$15
  Top 0.203: R28.2 5.99,2.54 7.11,3.66 7.11,9.35 8.46,10.7 B2.A B2.A'
N$16
  Top 0.203: B3.A' B3.A 21.32,23.59 22.05,22.86 R29.2
N$17
  Top 0.203: B4.A 1.81,15.97 1.93,15.85 1.93,9.42 B4.A' 1.81,6.12 2.23,5.69 2.94,5.69 R30.2
N$18
  Top 0.203: B5.A B5.A' 19.89,1.81 20.62,2.54 R31.2
N$19
  Top 0.203: B6.A' 26.13,15.54 | R32.2 24.98,19.62 24.99,19.61 25.7,19.61 26.11,19.2 26.11,15.56 26.13,15.54 | B6.A 25.14,9.3 22.96,11.48 22.96,12.38 26.13,15.54
OSC1
  Bottom 0.203: C9.1 12.65,6.77 Y2.3 13.82,7.93 13.82,9.55 12.09,11.28 12.09,13.82 11.72,14.18 U2.23
OSC2
  Bottom 0.203: C8.1 10.21,8.47 Y2.1 11.38,9.64 11.38,13.61 11.07,13.92 U2.24
RESET  (via drill 0.25 pad 0.51, 0.38 pad 0.76)
  Top 0.203: B1.A B1.A' 11.56,29.75 | v101.7,6.3 73.61,6.3 JP2.3 | 11.56,29.75 12.5,30.68 12.5,34.65 13.31,35.46 20.12,35.46 22.45,33.12 24.69,33.12 25.81,34.24 v31.09,34.24 | 34.45,44.81 R16.2 34.43,44.83 33.15,44.83 32.64,44.32 v32.64,43.94 | v28.45,23.37 30.48,23.37 31.09,23.98 v31.09,31.5 | v15.24,26.31 15,26.31 11.56,29.75
  Bottom 0.203: U2.10 14.32,25.4 v15.24,26.31 15.28,26.35 R10.1 | 101.73,6.33 v101.7,6.3 101.22,6.78 101.22,26.16 J2.6 | JP2.3 71.07,3.81 68.99,5.89 36.37,5.89 28.45,13.82 v28.45,23.37 | v31.09,31.5 v31.09,34.24 31.95,34.24 32.64,34.92 v32.64,43.94
RESET_EXP
  Top 0.203: R16.1 R17.2 36.77,43.1 37.49,43.1 40.23,45.85 43.28,45.85 43.65,46.22 U1.23
SCK  (via drill 0.25 pad 0.51)
  Top 0.203: J2.4 103,30.48 105.26,30.48 105.77,30.99 105.77,32.94 105.18,33.53 94.18,33.53 93.34,34.37 U7.2 93.34,38.12 92.76,38.71 86.87,38.71 86.26,38.1 86.26,27.53 85.24,26.52 v77.22,26.52 | v28.85,26.52 20.02,26.52 v19,27.53
  Bottom 0.203: v77.22,26.52 v28.85,26.52 | v19,27.53 19,32 18.29,32.72 13.92,32.72 13.11,31.9 13.11,22.79 U2.8
SCK_3V3  (via drill 0.25 pad 0.51)
  Top 0.203: U7.3 94.61,37.87 v93.88,38.61 | v93.88,14.45 U$3.P$5
  Bottom 0.203: v93.88,38.61 v93.88,14.45
SCL
  Top 0.203: R15.1 47.33,41.07 52.53,41.07 53.53,42.07 Q2.3 55.96,42.95 56.9,43.89 JP4.10
  Bottom 0.203: JP6.11 76.2,56.49 74.37,54.66 66.6,54.66 65.79,53.85 65.79,50.55 65.02,49.78 57.91,49.78 56.9,50.8 JP4.10
SCL_3V3
  Top 0.203: Q2.2 49.58,42 R14.1 49.47,42.09 48.26,42.09 44.45,45.9 U1.25
SDA
  Top 0.203: Q1.3 38.93,41.56 39.42,41.07 42.88,41.07 | 42.88,41.07 44.92,41.07 R13.1 | JP4.9 59.38,52.07 57.51,50.19 57.51,43.69 52.22,38.41 43.69,38.41 42.88,39.22 42.88,41.07
  Bottom 0.203: JP6.12 73.66,56.39 72.34,55.07 65.48,55.07 63.25,52.83 63.25,51.05 62.48,50.29 59.94,50.29 59.44,50.8 JP4.9
SDA_3V3
  Top 0.203: Q1.2 42.98,43.9 R12.1 43.09,43.81 43.79,43.81 44.05,44.08 U1.24
STRIP_B
  Top 0.61: Q5.2 Q5.4 42.57,15.95 45.72,12.8 JP9.3
STRIP_G
  Top 0.61: Q3.2 Q3.4 60.45,15.95 53.44,8.94 50.85,8.94 JP9.1
STRIP_R
  Top 0.61: Q4.2 Q4.4 51.41,15.95 48.26,12.8 JP9.2
TPIN+
  Bottom 0.203: J1.3 10.46,45.73 10.46,40.23 11.33,39.37 R7.2 20.22,37.58 20.22,35.36 21.44,34.14 21.44,26.62 19.51,24.69 16.87,24.69 16.27,24.1 U2.13
TPIN-  (via drill 0.25 pad 0.51)
  Top 0.203: v19.61,38.41 19.61,39.11 J1.6
  Bottom 0.203: R8.2 16.81,41.91 J1.6 | U2.12 15.62,22.84 15.65,22.86 15.65,24.38 16.56,25.3 18.8,25.3 20.83,27.33 20.83,33.93 19.61,35.15 v19.61,38.41
TPOUT+  (via drill 0.25 pad 0.51)
  Top 0.203: v22.76,34.14 22.76,36.58 21.95,37.39 13.31,37.39 10.46,40.23 10.46,48.27 J1.1
  Bottom 0.203: R5.1 17.02,49.53 16.36,50.19 12.39,50.19 J1.1 | U2.17 15.62,17.05 16.56,17.98 22.25,17.98 22.76,18.49 v22.76,34.14
TPOUT-  (via drill 0.25 pad 0.51)
  Top 0.203: v23.88,34.14 23.88,39.92 J1.2
  Bottom 0.203: R6.1 16.81,46.99 J1.2 | U2.16 16.27,16.78 16.97,17.48 23.06,17.48 23.88,18.29 v23.88,34.14

## Text on the board
_tNames: ETHERNET | VIN | 3.3 | 5 | DA | I2C | CL | A0 | A1 | A2 | A3 | A4 | A5 | D3 | D2 | D1 | D0 | 16CH I/O EXPANDER 3.3V OUT (5V IN TOLLERANT) | + | . | LCD 16X2 | . | RESET | D9 | D8 | D7 | D6 | D5 | D4 | LCD CONTRAST | L13 | B2 | ON | B3 | B5 | B1 | MICRO SD CARD | +VIN | R | G | B | BE SHIELD | B4 | V.1.4 Final 05/2014 | RGB LED STRIP